# Altium PCB pcb.PcbDoc
Units mm, origin at the board's own origin, x right, y up, seen from the top; angles counter-clockwise.
Board outline 56.13 x 22.1 mm, 2 copper layers (Top Layer, Bottom Layer), stack 1.569 mm thick; 36 components, 25 nets, 115 pads, 28 vias.
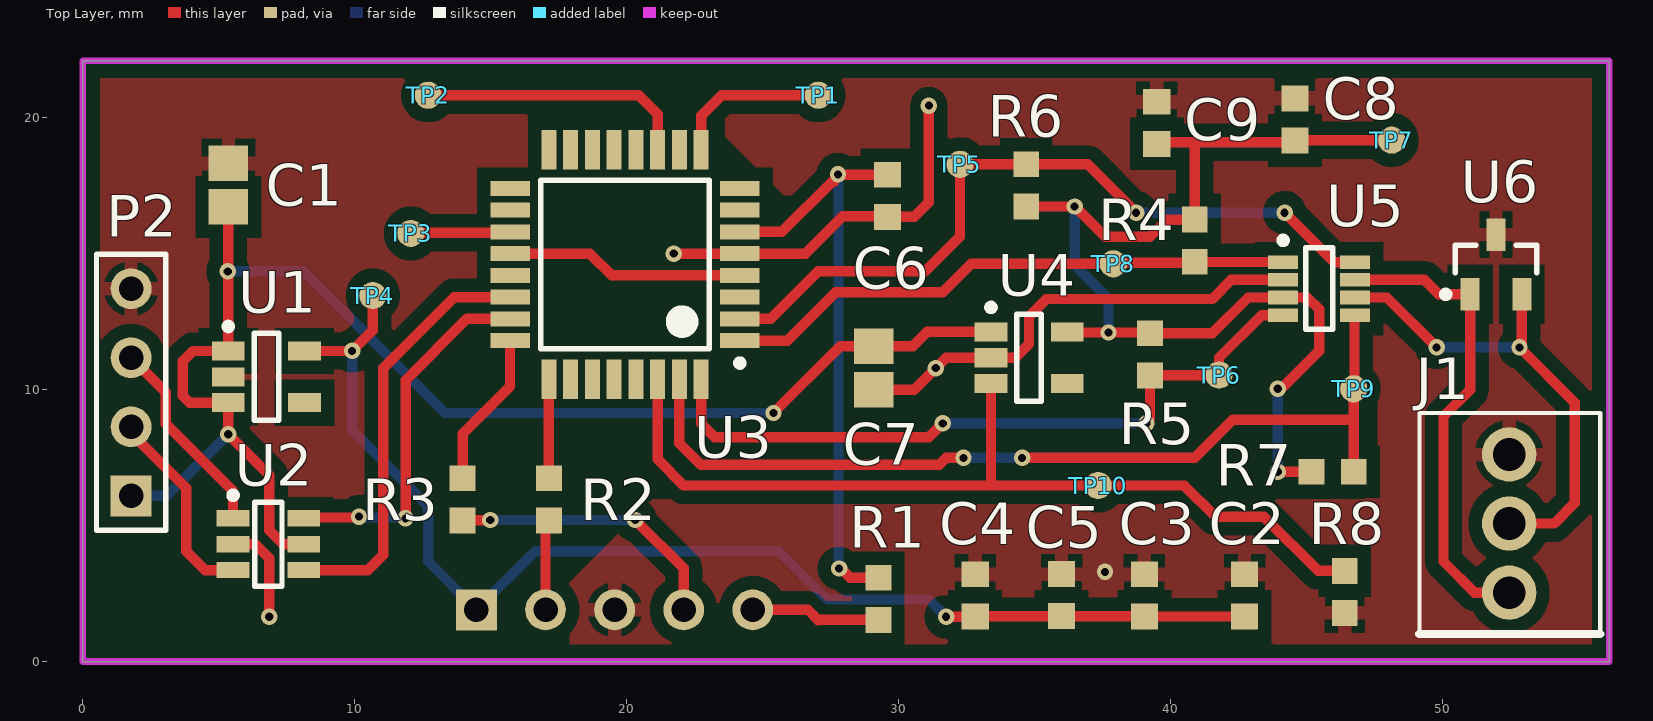
[diagram p0: Top Layer view]
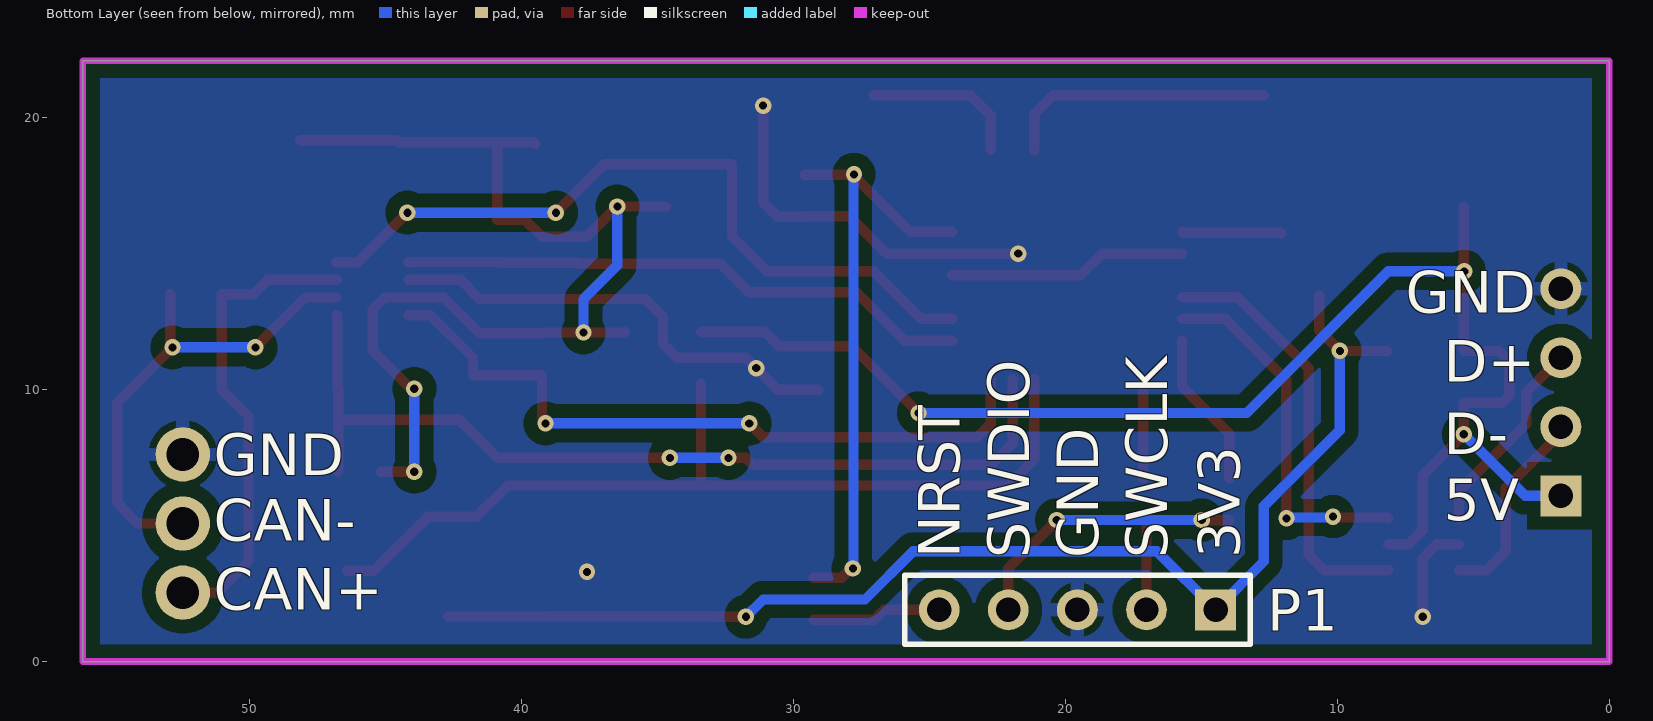
[diagram p1: Bottom Layer view, seen from below]

## Layer stack, top to bottom
Top Solder: solder mask 0.0254, SM-001, Dk 4
Top Layer: signal copper 0.035
Dielectric 1: core 1.4986, Core-043, Dk 4.3
Bottom Layer: signal copper 0.035
Bottom Solder: solder mask 0.0254, SM-001, Dk 4

## Board outline
56.134,22.098 0,22.098 0,0 56.134,0

## Design rules (kind name [scope] priority, off if disabled: settings)
BoardOutlineClearance [All] p1: gap=0.3 ignorepadtopadclearanceinfootprint=FALSE except(0.4: Arc-SplitBarrior Arc-SplitContinuation Track-SplitBarrior Track-SplitContinuation SMDPad-SplitBarrior SMDPad-SplitContinuation THPad-SplitBarrior THPad-SplitContinuation Via-SplitBarrior Via-SplitContinuation Fill-SplitBarrior Fill-SplitContinuation Poly-SplitBarrior Poly-SplitContinuation Region-SplitBarrior Region-SplitContinuation Text-SplitBarrior Text-SplitContinuation)
Clearance "Clearance Different Nets" [All] p1: gap=0.2 ignorepadtopadclearanceinfootprint=FALSE except(0.089: Arc-Arc Arc-Track Arc-SMDPad Track-Track Track-SMDPad; 0.127: SMDPad-SMDPad SMDPad-Via THPad-Via Via-Via; 0.254: Arc-Via Arc-Text Track-Via Track-Text SMDPad-Text THPad-Text Via-Text Fill-Text Poly-Text Region-Text Text-Text; 0.5: THPad-THPad Via-Hole)
Clearance "Clearance Same Nets" [All] p2: gap=0.2 ignorepadtopadclearanceinfootprint=FALSE except(0.089: Arc-Arc Arc-Track Arc-SMDPad Track-Track Track-SMDPad SMDPad-SMDPad; 0.127: SMDPad-Via THPad-Via; 0.254: Arc-Via Arc-Text Track-Via Track-Text SMDPad-Text THPad-Text Via-Via Via-Text Fill-Text Poly-Text Region-Text Text-Text)
Clearance "Clearance Bottom Layer" [OnLayer('Bottom Layer')] p3: gap=0.203 ignorepadtopadclearanceinfootprint=TRUE except(0.254: Arc-Text Track-Text SMDPad-Text THPad-Text Via-Text Fill-Text Poly-Text Region-Text Text-Text)
Clearance "Clearance Top Layer" [OnLayer('Top Layer')] p4: gap=0.203 ignorepadtopadclearanceinfootprint=TRUE except(0.254: Arc-Text Track-Text SMDPad-Text THPad-Text Via-Text Fill-Text Poly-Text Region-Text Text-Text)
Creepage [All] p1: checkdistance=0.5 applytopolygonpour=TRUE
DiffPairsRouting [All] p1: maxlimit=0.254 minlimit=0.254 mostfreqgap=0.254 toplayer_minwidth=0.381 toplayer_maxwidth=0.381 toplayer_prefwidth=0.381 bottomlayer_minwidth=0.381 bottomlayer_maxwidth=0.381 bottomlayer_prefwidth=0.381 maxuncoupledlength=12.7
HoleSize [All] p1: absolutevalues=TRUE maxlimit=6.3 minlimit=0.2 maxpercent=80.000 minpercent=20.000
MinimumAnnularRing [All] p1: minimumring=0.13
MinimumSolderMaskSliver [All] p1: minsoldermaskwidth=0.1
PolygonConnect PolygonConnect_1 [All] p1: thpad.connectstyle=Relief thpad.reliefconductorwidth=0.508 thpad.reliefentries=4 thpad.polygonreliefangle="90 Angle" thpad.airgapwidth=0.254 smdpad.connectstyle=Relief smdpad.reliefconductorwidth=0.508 smdpad.reliefentries=4 smdpad.polygonreliefangle="90 Angle" smdpad.airgapwidth=0.254 via.connectstyle=Direct via.reliefconductorwidth=0.508 via.reliefentries=4 via.polygonreliefangle="90 Angle" via.airgapwidth=0.254
RoutingCorners [All] p1: cornerstyle=Round minsetback=2.54 maxsetback=2.54
RoutingVias [All] p1: holewidth=0.5 width=1 viastyle="Through Hole" minholewidth=0.2 minwidth=0.35 maxholewidth=1 maxwidth=2
SilkToSilkClearance [All] p1: silktosilkclearance=0.1
SilkToSolderMaskClearance [IsPad] p1: minsilkscreentomaskgap=0.1 clearancetoexposedcopper=TRUE
SolderMaskExpansion [All] p1: expansion=0.102 istentingtop=FALSE
SupplyNets "Schematic Supply Nets_4" [InNet('CAN_3V3')] p1: voltage=0.000
SupplyNets "Schematic Supply Nets_3" [InNet('MCU_3V3')] p2: voltage=0.000
SupplyNets "Schematic Supply Nets_2" [InNet('GND')] p3: voltage=0.000
SupplyNets "Schematic Supply Nets_1" [InNet('USB_5V')] p4: voltage=0.000
SupplyNets "Schematic Supply Nets" [InNet('3V3_MCU')] p5: voltage=0.000
Width [All] p1: maxlimit=2.54 minlimit=0.089 preferedwidth=0.381
24 further rules are at their usual default settings.

## Classes and differential pairs
component class top: J1 P1 P2
component class MCU: C1 C2 C3 C4 C5 C6 R1 R2 R3 TP1 TP2 TP3 TP4 U1 U2 U3
component class CAN: C7 C8 C9 R4 R5 R6 R7 R8 TP5 TP6 TP7 TP8 TP9 TP10 U4 U5 U6
differential pair USB_D: +USB_D_P -USB_D_N
differential pair CAN_BUS: +CAN_BUS_P -CAN_BUS_N

## Components (designator, comment, footprint, x,y, rotation, side; value= is the part's Value field where it differs from the comment)
C1 "10uF, 10V, 0805" GENERIC_MLCC_CAP_0805_IPC_MEDIUM_DENSITY 5.359,17.526 r270 top locked
C2 "100nF, 10V, 0603" GENERIC_MLCC_CAP_0603_IPC_MEDIUM_DENSITY 42.723,2.438 r270 top locked
C3 "4.7F, 10V, 0603" GENERIC_MLCC_CAP_0603_IPC_MEDIUM_DENSITY 39.04,2.438 r270 top locked
C4 "100nF, 10V, 0603" GENERIC_MLCC_CAP_0603_IPC_MEDIUM_DENSITY 32.817,2.438 r270 top locked
C5 "4.7F, 10V, 0603" GENERIC_MLCC_CAP_0603_IPC_MEDIUM_DENSITY 35.992,2.451 r270 top locked
C6 "100nF, 10V, 0603" GENERIC_MLCC_CAP_0603_IPC_MEDIUM_DENSITY 29.591,17.132 r90 top locked
C7 "10uF, 10V, 0805" GENERIC_MLCC_CAP_0805_IPC_MEDIUM_DENSITY 29.083,10.795 r90 top locked
C8 "4.7F, 10V, 0603" GENERIC_MLCC_CAP_0603_IPC_MEDIUM_DENSITY 44.577,19.939 r270 top locked
C9 "100nF, 10V, 0603" GENERIC_MLCC_CAP_0603_IPC_MEDIUM_DENSITY 39.497,19.812 r270 top locked
J1 "3-Way Terminal Block" TERMINAL_BLOCK_2.5MM_3WAY 52.451,5.08 r90 top value=2.5mm
P1 "Pin Header 5" PIN_HEADER_1X5 14.478,1.905 r0 bottom locked
P2 "Pin Header 4" PIN_HEADER_1X4 1.778,6.096 r90 top
R1 "22R, 0603" GENERIC_CHIP_RES_0603_IPC_MEDIUM_DENSITY 29.261,2.311 r90 top locked
R2 "22R, 0603" GENERIC_CHIP_RES_0603_IPC_MEDIUM_DENSITY 17.145,5.969 r90 top locked
R3 "22R, 0603" GENERIC_CHIP_RES_0603_IPC_MEDIUM_DENSITY 13.97,5.969 r90 top locked
R4 "10k, 0603" GENERIC_CHIP_RES_0603_IPC_MEDIUM_DENSITY 40.894,15.481 r90 top locked
R5 "10k, 0603" GENERIC_CHIP_RES_0603_IPC_MEDIUM_DENSITY 39.243,11.303 r90 top locked
R6 "10k, 0603" GENERIC_CHIP_RES_0603_IPC_MEDIUM_DENSITY 34.696,17.513 r270 top locked
R7 "10k, 0603" GENERIC_CHIP_RES_0603_IPC_MEDIUM_DENSITY 45.961,6.985 r180 top locked
R8 "10k, 0603" GENERIC_CHIP_RES_0603_IPC_MEDIUM_DENSITY 46.406,2.565 r270 top locked
TP1 "Test Point" TEST_POINT_CIRCLE_1MM 27.051,20.828 r90 top locked value=1mm
TP2 "Test Point" TEST_POINT_CIRCLE_1MM 12.7,20.828 r90 top locked value=1mm
TP3 "Test Point" TEST_POINT_CIRCLE_1MM 12.065,15.748 r90 top locked value=1mm
TP4 "Test Point" TEST_POINT_CIRCLE_1MM 10.668,13.462 r90 top locked value=1mm
TP5 "Test Point" TEST_POINT_CIRCLE_1MM 32.258,18.288 r90 top locked value=1mm
TP6 "Test Point" TEST_POINT_CIRCLE_1MM 41.783,10.541 r90 top locked value=1mm
TP7 "Test Point" TEST_POINT_CIRCLE_1MM 48.133,19.177 r90 top locked value=1mm
TP8 "Test Point" TEST_POINT_CIRCLE_1MM 37.897,14.63 r90 top locked value=1mm
TP9 "Test Point" TEST_POINT_CIRCLE_1MM 46.736,10.033 r90 top locked value=1mm
TP10 "Test Point" TEST_POINT_CIRCLE_1MM 37.338,6.477 r90 top locked value=1mm
U1 "NCV8163ASN330T1G" NCV8163ASN330T1G_TSOP5 6.753,10.475 r0 top locked value="3V3, 250mA"
U2 "USBLC6-2SC6" USBLC6-2SC6-SOT23-6L 6.828,4.318 r0 top locked
U3 "STM32G0C1KET6N" STM32G0C1KET6N_LQFP32 19.939,14.605 r180 top locked
U4 "NCV8163ASN330T1G" NCV8163ASN330T1G_TSOP5 34.798,11.176 r0 top locked value="3V3, 250mA"
U5 "TCAN337DCN" TCAN337DCN_SOT23_8 45.466,13.716 r0 top locked
U6 "PESD1CAN" PESD1CAN_SOT23_3 51.968,14.605 r90 top locked

## Footprints (in the part's own frame and the unit in brackets; to place one, negate y for a bottom-side part, rotate by r counter-clockwise, add the part's x,y. Pads: shape width x height; smd on the part's side, far side on the other; paste and mask are expansions set on the pad)
GENERIC_CHIP_RES_0603_IPC_MEDIUM_DENSITY [mm] "Generic Chip Resistor, 2-Leads, Body 1,63x0,82mm, IPC Medium Density"
  rect 0.95x0.95 smd: 1(-0.775,0) 2(0.775,0)
  body extent -0.89,-0.47 0.89,0.47, height 0.38
GENERIC_MLCC_CAP_0603_IPC_MEDIUM_DENSITY [mm] "Generic MLCC Capacitor, 2-Leads, Body 1,60x0,80mm, IPC Medium Density"
  rect 0.95x1 smd: 1(-0.775,0) 2(0.775,0)
  body extent -0.87,-0.48 0.87,0.48, height 0.9
GENERIC_MLCC_CAP_0805_IPC_MEDIUM_DENSITY [mm] "Generic MLCC Capacitor, 2-Leads, Body 2,00x1,25mm, IPC Medium Density"
  rect 1.3x1.45 smd: 1(-0.8,0) 2(0.8,0)
  body extent -1.1,-0.72 1.1,0.72, height 1.3
NCV8163ASN330T1G_TSOP5 [mm] "TSOP, 5-Leads, Body 3,00x1,50mm, Pitch 0,95mm, IPC Medium Density"
  rect 1.2x0.7 smd: 1(-1.4,0.95) 2(-1.4,0) 3(-1.4,-0.95) 4(1.4,-0.95) 5(1.4,0.95)
  silkscreen extent -1.52,-1.6 0.45,1.97, body extent -1.38,-1.6 1.38,1.6, height 1.1
PESD1CAN_SOT23_3 [mm] "SOT23, 3-Leads, Body 2,90x2,30mm, Pitch 0,95mm, IPC Medium Density"
  rect 1.2x0.7 smd: 1(-1.1,0.95) 2(-1.1,-0.95) 3(1.1,0)
  silkscreen extent -1.22,-1.5 0.7,1.97, body extent -1.3,-1.5 1.3,1.5, height 1.1
PIN_HEADER_1X4 [mm] "pin header, 4-pin"
  rect 1.5x1.5 hole 0.9: 1(0,0)
  round 1.5 hole 0.9: 2(2.54,0) 3(5.08,0) 4(7.62,0)
  silkscreen extent -1.27,-1.27 8.89,1.27, body extent -1.27,-1.24 8.89,1.24, height 8.54
PIN_HEADER_1X5 [mm] "pin header, 5-pin"
  rect 1.5x1.5 hole 0.9: 1(0,0)
  round 1.5 hole 0.9: 2(2.54,0) 3(5.08,0) 4(7.62,0) 5(10.16,0)
  silkscreen extent -1.27,-1.27 11.43,1.27, body extent -1.27,-1.24 11.43,1.24, height 8.54
STM32G0C1KET6N_LQFP32 [mm] "LQFP32, Body 7,00x7,00mm, Pitch 0,80mm, IPC Medium Density"
  rect 1.45x0.55 smd: 1(-4.225,2.8) 2(-4.225,2) 3(-4.225,1.2) 4(-4.225,0.4) 5(-4.225,-0.4) 6(-4.225,-1.2) 7(-4.225,-2) 8(-4.225,-2.8) 17(4.225,-2.8) 18(4.225,-2) 19(4.225,-1.2) 20(4.225,-0.4) 21(4.225,0.4) 22(4.225,1.2) 23(4.225,2) 24(4.225,2.8)
  rect 0.55x1.45 smd: 9(-2.8,-4.225) 10(-2,-4.225) 11(-1.2,-4.225) 12(-0.4,-4.225) 13(0.4,-4.225) 14(1.2,-4.225) 15(2,-4.225) 16(2.8,-4.225) 25(2.8,4.225) 26(2,4.225) 27(1.2,4.225) 28(0.4,4.225) 29(-0.4,4.225) 30(-1.2,4.225) 31(-2,4.225) 32(-2.8,4.225)
  silkscreen extent -4.35,-3.1 3.1,3.75, body extent -4.5,-4.5 4.5,4.5, height 1.6
TCAN337DCN_SOT23_8 [mm] "SOT23, 8-Leads, Body 2,90x1,60mm, Pitch 0,65mm, IPC Medium Density"
  rect 1.1x0.5 smd: 1(-1.325,0.975) 2(-1.325,0.325) 3(-1.325,-0.325) 4(-1.325,-0.975) 5(1.325,-0.975) 6(1.325,-0.325) 7(1.325,0.325) 8(1.325,0.975)
  silkscreen extent -1.45,-1.5 0.5,1.9, body extent -1.39,-1.5 1.39,1.5, height 1.45
TERMINAL_BLOCK_2.5MM_3WAY [mm] "terminal block 2.5mm 3way"
  round 2 hole 1.2: 1(-2.54,0) 2(0,0) 3(2.54,0)
  silkscreen extent -4.06,-3.35 4.06,3.3, body extent -4.04,-3.25 4.04,3.25, height 10
TEST_POINT_CIRCLE_1MM [mm] "Circular test point, 1mm radius."
  round 1 smd paste-2539.97 mask+0: 1(0,0)
USBLC6-2SC6-SOT23-6L [mm] "SOT23, 6-Leads, Body 2,93x2,80mm, Pitch 0,95mm, IPC Medium Density"
  rect 1.2x0.6 smd: 1(-1.3,0.95) 2(-1.3,0) 3(-1.3,-0.95) 4(1.3,-0.95) 5(1.3,0) 6(1.3,0.95)
  silkscreen extent -1.42,-1.55 0.5,1.92, body extent -1.5,-1.53 1.5,1.53, height 1.45

## Part data
C1 C2 C3 C4 C5 C6 C7 C8 C9: library part "Generic Non-polarised Capacitor", "generic non-polarised capacitor"
J1: "3-way wire to board terminal block"
P1: "pin header, 5-pin"
P2: "pin header, 4-pin"
R1 R2 R3 R4 R5 R6 R7 R8: library part "Generic Resistor", "generic resistor"
TP1 TP2 TP3 TP4 TP5 TP6 TP7 TP8 TP9 TP10: "generic test point", Part Number="Test Point"
U1 U4: "3V3 250 mA LDO", Manufacturer=Onsemi, Part Number=NCV8163ASN330T1G
U2: "Very low capacitance ESD protection for the USB bus.", Manufacturer=ST, Part Number=USBLC6-2SC6
U3: "STM32G0, Arm® Cortex®-M0+ 32-bit MCU, 512KB Flash, 144KB RAM, LQFP32", Manufacturer=ST, Part Number=STM32G0C1KET6N
U5: "Texas Instruments 3.3-V CAN transceiver with CAN FD support. SOT-32 package.", Manufacturer="Texas Instruments", Part Number=TCAN337DCN
U6: "CAN bus ESD protection diode", Manufacturer=Nexperia, Part Number=PESD1CAN

## Via types
v1: diameter 0.6, hole 0.3, Top Layer to Bottom Layer, tented both sides, 28 vias

## Nets (pads, with @x,y where several pads share a name; then routed paths per layer and width w, separated by ;. In a path a pad name is that pad's centre, name@x,y a point inside that pad or via, vN(x,y) a via of type N, cw(c..) or ccw(c..) an arc to the next point about the centre after c; other vN are vias at no path point)
3V3_MCU: U3.4 U3.20 | length 8.8
  Top Layer w0.381: U3.20 18.65,15.005 19.45,14.205 U3.4
CAN_3V3: C8.2 C9.2 R4.2 R5.2 R6.2 R7.2 TP7.1 U4.5 U5.3 | length 41.5
  Top Layer w0.381: R6.2 v1(36.475,16.738) 37.592,15.621 39.243,15.621 39.878,16.256 R4.2 40.894,19.101 ; U4.5 36.222,12.102 v1(37.721,12.102) 39.219,12.102 R5.2 41.542,12.078 42.855,13.391 U5.3 45.029,13.391 45.466,12.954 45.466,11.43 v1@44.005,9.97 ; C9.2 39.56,19.101 40.894,19.101 ; v1(43.942,6.985) R7.2 ; TP7.1 48.127,19.171 44.583,19.171 C8.2 44.514,19.101 40.894,19.101
  Bottom Layer w0.381: v1(36.475,16.738) 36.475,14.579 37.721,13.333 v1(37.721,12.102) ; v1(43.942,6.985) v1(43.942,10.033)
CAN_BUS_N: J1.2 U5.6 U6.2 | length 17.7
  Top Layer w0.381: U5.6 47.95,13.391 v1(49.784,11.557) ; J1.2@52.705,5.08 54.102,5.08 54.864,5.842 54.864,9.525 v1(52.832,11.557) ; v1@52.918,11.643 U6.2
  Bottom Layer w0.381: v1(49.784,11.557) v1(52.832,11.557)
CAN_BUS_P: J1.1 U5.7 U6.1 | length 17.6
  Top Layer w0.381: U5.7 49.332,14.041 49.868,13.505 U6.1 51.018,9.997 50.038,9.017 50.038,3.683 51.181,2.54 J1.1
CAN_EN: R8.1 TP10.1 U3.30 U4.3 | length 33.7
  Top Layer w0.381: U3.30 21.139,7.436 22.098,6.477 33.507,6.477 ; U4.3 33.398,6.586 33.507,6.477 ; R8.1 45.428,3.34 43.434,5.334 41.656,5.334 40.513,6.477 TP10.1 33.507,6.477
CAN_FAULT: R7.1 TP9.1 U3.31 U5.5 | length 33.9
  Top Layer w0.381: U3.31 21.939,8.033 22.733,7.239 31.496,7.239 31.75,7.493 v1(32.385,7.493) ; v1(34.544,7.493) 40.894,7.493 42.291,8.89 46.736,8.89 ; R7.1 46.736,8.89 ; U5.5 46.763,12.713 46.763,10.06 TP9.1 46.736,8.89
  Bottom Layer w0.381: v1(32.385,7.493) v1(34.544,7.493)
CAN_RXD: R5.1 TP6.1 U3.32 U5.4 | length 26.4
  Top Layer w0.381: U3.32 22.739,8.757 23.241,8.255 31.115,8.255 v1(31.623,8.763) ; v1(39.116,8.763) 39.116,8.822 39.243,8.949 R5.1 39.249,10.535 41.777,10.535 TP6.1 41.783,11.176 43.348,12.741 U5.4
  Bottom Layer w0.381: v1(31.623,8.763) v1(39.116,8.763)
CAN_SILENT: R6.1 TP5.1 U3.2 U5.8 | length 28
  Top Layer w0.381: U3.2 25.305,12.605 27.051,14.351 30.988,14.351 32.258,15.621 TP5.1 R6.1 36.957,18.288 v1(38.735,16.51) ; v1(44.196,16.51) 46.015,14.691 U5.8
  Bottom Layer w0.381: v1(38.735,16.51) v1(44.196,16.51)
CAN_TXD: R4.1 TP8.1 U3.1 U5.1 | length 21.2
  Top Layer w0.381: U3.1 25.902,11.805 27.686,13.589 31.623,13.589 32.664,14.63 TP8.1 37.935,14.668 40.856,14.668 40.886,14.698 44.133,14.698 U5.1
GND: C1.1 C2.1 C3.1 C4.1 C5.1 C6.1 C7.1 C8.1 C9.1 J1.3 P1.3 P2.4 R8.2 U1.2 U2.2 U3.5 U4.2 U5.2 U6.3 | length 34.8
  Top Layer w0.381: U2.2 6.35,4.318 6.858,3.81 v1(6.858,1.651) ; v1(21.736,15.005) U3.5 26.562,15.005 27.94,16.383 29.565,16.383 C6.1 30.581,16.357 31.115,16.891 v1(31.115,20.447) ; C7.1 30.569,9.995 31.75,11.176 U4.2 34.29,11.176 34.798,11.684 34.798,12.7 35.433,13.335 41.529,13.335 42.235,14.041 U5.2
  other v1: 37.592,3.302 31.369,10.795
MCU_3V3: C2.2 C3.2 C4.2 C5.2 P1.1 TP4.1 U1.5 | length 45.7
  Top Layer w0.381: U1.5 9.901,11.425 v1(9.906,11.43) 10.668,12.192 TP4.1 ; v1(31.75,1.651) 31.756,1.657 32.811,1.657 32.823,1.67 35.985,1.67 C5.2 35.998,1.67 39.033,1.67 C3.2 C2.2
  Bottom Layer w0.381: v1(9.906,11.43) 9.906,8.509 12.7,5.715 12.7,3.683 P1.1 16.637,4.064 25.591,4.064 27.369,2.286 31.115,2.286 v1(31.75,1.651)
MCU_LSCLK: TP1.1 U3.9 | length 5.9
  Top Layer w0.381: U3.9 22.739,20.072 23.495,20.828 TP1.1
MCU_MCLK: TP3.1 U3.19 | length 3.7
  Top Layer w0.381: TP3.1 12.093,15.776 15.685,15.776 U3.19
MCU_NRST: C6.2 R1.2 U3.6 | length 22.4
  Top Layer w0.381: U3.6 25.711,15.805 27.559,17.653 27.618,17.653 27.618,17.703 27.774,17.859 v1(27.774,17.918) ; v1(27.813,3.429) 27.872,3.429 28.215,3.086 R1.2 ; v1@27.872,17.907 C6.2
  Bottom Layer w0.381: v1(27.774,17.918) 27.793,17.898 27.793,3.449 v1(27.813,3.429)
MCU_SWCLK: R2.2 U3.25 | length 4.1
  Top Layer w0.381: U3.25@17.139,9.93 U3.25 17.142,10.377 17.142,6.747 R2.2
MCU_SWDIO: R3.2 U3.24 | length 5.8
  Top Layer w0.381: R3.2 13.97,8.382 15.714,10.126 U3.24
NetP1_2: P1.2 R2.1 | length 3.3
  Top Layer w0.381: P1.2 R2.1@17.018,5.207
NetP1_4: P1.4 R3.1 | length 10.4
  Top Layer w0.381: R3.1 14.973,5.194 v1(14.986,5.207) ; v1(20.32,5.207) 22.098,3.429 P1.4
  Bottom Layer w0.381: v1(14.986,5.207) v1(20.32,5.207)
NetP1_5: P1.5 R1.1 | length 4.8
  Top Layer w0.381: P1.5 26.67,1.905 27.051,1.524 27.063,1.536 R1.1
NetP2_2: P2.2 U2.3 | length 7.5
  Top Layer w0.381: P2.2@1.549,8.636 3.81,6.375 3.81,4.064 4.506,3.368 U2.3
NetP2_3: P2.3 U2.1 | length 7.5
  Top Layer w0.381: P2.3 3.048,9.906 3.048,8.75 5.528,6.27 U2.1
USB_5V: C1.2 C7.2 P2.1 U1.1 U1.3 U2.5 U4.1 | length 53.2
  Top Layer w0.381: C1.2 5.353,16.72 U1.1 4.059,11.425 3.683,11.049 3.683,9.779 3.937,9.525 U1.3 v1(5.353,8.363) 6.858,6.858 6.858,4.826 7.366,4.318 U2.5 ; v1(25.4,9.144) 27.851,11.595 C7.2 30.518,11.595 31.049,12.126 U4.1
  Bottom Layer w0.381: P2.1@1.549,6.096 3.087,6.096 v1(5.353,8.363) ; v1(5.334,14.351) 8.128,14.351 13.335,9.144 v1(25.4,9.144)
USB_D_N: U2.4 U3.22 | length 15.8
  Top Layer w0.381: U2.4 10.48,3.368 11.049,3.937 11.049,10.795 13.659,13.405 U3.22
USB_D_P: U2.6 U3.23 | length 13.7
  Top Layer w0.381: U2.6 8.161,5.301 10.127,5.301 v1(10.16,5.334) ; v1(11.872,5.268) 11.872,10.348 14.129,12.605 U3.23
  Bottom Layer w0.381: v1(10.16,5.334) 10.193,5.301 11.839,5.301 v1(11.872,5.268)
USB_NOE: TP2.1 U3.11 | length 10
  Top Layer w0.381: TP2.1 20.447,20.828 21.139,20.136 U3.11
pads on no net: U1.4 U3.3 U3.7 U3.8 U3.10 U3.12 U3.13 U3.14 U3.15 U3.16 U3.17 U3.18 U3.21 U3.26 U3.27 U3.28 U3.29 U4.4

## Polygon pours and split planes (outlines as drawn)
GND on Top Layer "GND_L01_P003" (solid, remove dead copper, pour order 3): 17.653,22.098 17.653,17.145 14.732,17.145 14.732,0 0,0 0,22.098
GND on Top Layer "GND_L01_P001" (solid, remove dead copper, pour order 1): 23.622,22.098 23.622,19.304 25.781,17.145 27.305,17.145 28.702,18.542 37.084,18.542 43.18,12.446 45.593,12.446 47.625,10.414 47.625,6.477 47.117,5.969 20.955,5.969 17.907,2.921 17.907,0 56.134,0 56.134,22.098
GND on Bottom Layer "GND_L02_P002" (solid, remove dead copper, pour order 2): 0,22.098 56.134,22.098 56.134,0 0,0

## Keep-outs
Keep-Out Layer:
  the board outline again, w0.254

## Silkscreen, mask and mechanical layers (free items; w line width, h text height)
Bottom Overlay:
  text "GND" at 7.493,12.827 h1.52
  text "D+" at 6.096,10.287 h1.52
  text "D-" at 6.096,7.62 h1.52
  text "GND" at 51.308,6.858 h1.52
  text "5V" at 6.096,5.207 h1.52
  text "CAN-" at 51.308,4.445 h1.52
  text "3V3" at 13.589,3.81 h1.52 r270
  text "SWCLK" at 16.256,3.81 h1.52 r270
  text "GND" at 18.796,3.81 h1.52 r270
  text "SWDIO" at 21.336,3.81 h1.52 r270
  text "NRST" at 23.876,3.81 h1.52 r270
  text "CAN+" at 51.308,1.905 h1.52